# Altium PCB PCB2.PcbDoc
Units mm, origin at the board's own origin, x right, y up, seen from the top; angles counter-clockwise.
Board outline 52.5 x 30.5 mm, 2 copper layers (Top Layer, Bottom Layer), stack 0.8 mm thick; 37 components, 26 nets, 224 pads, 121 vias.
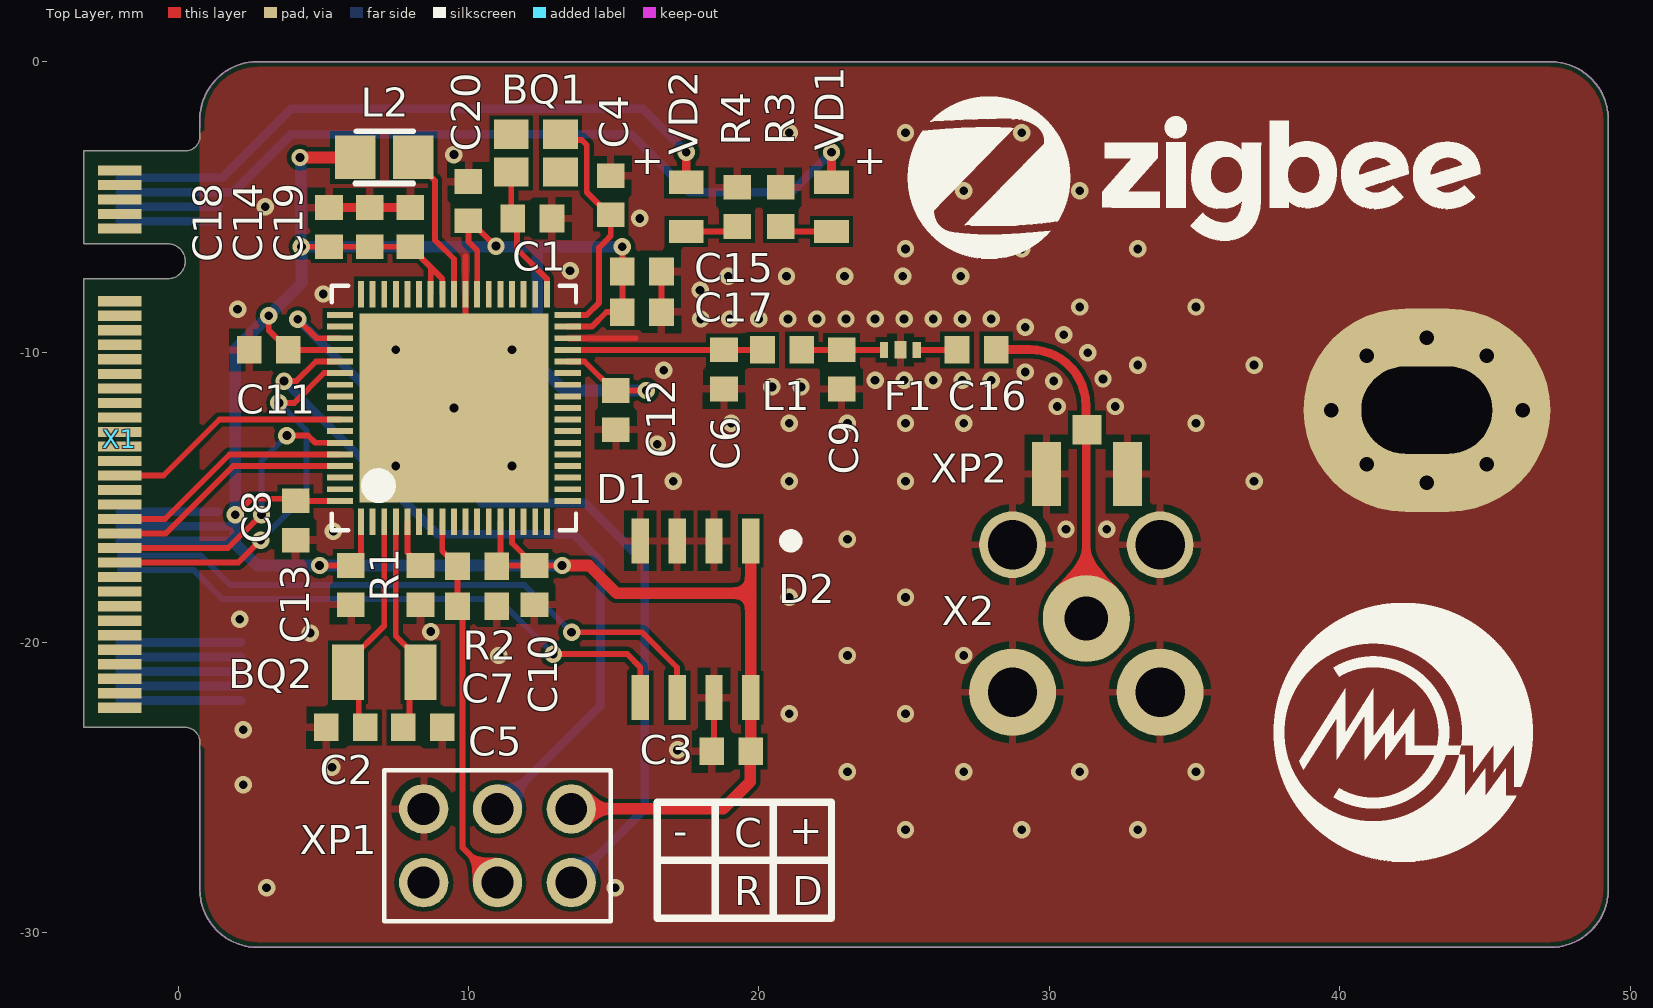
[diagram p0: Top Layer view]
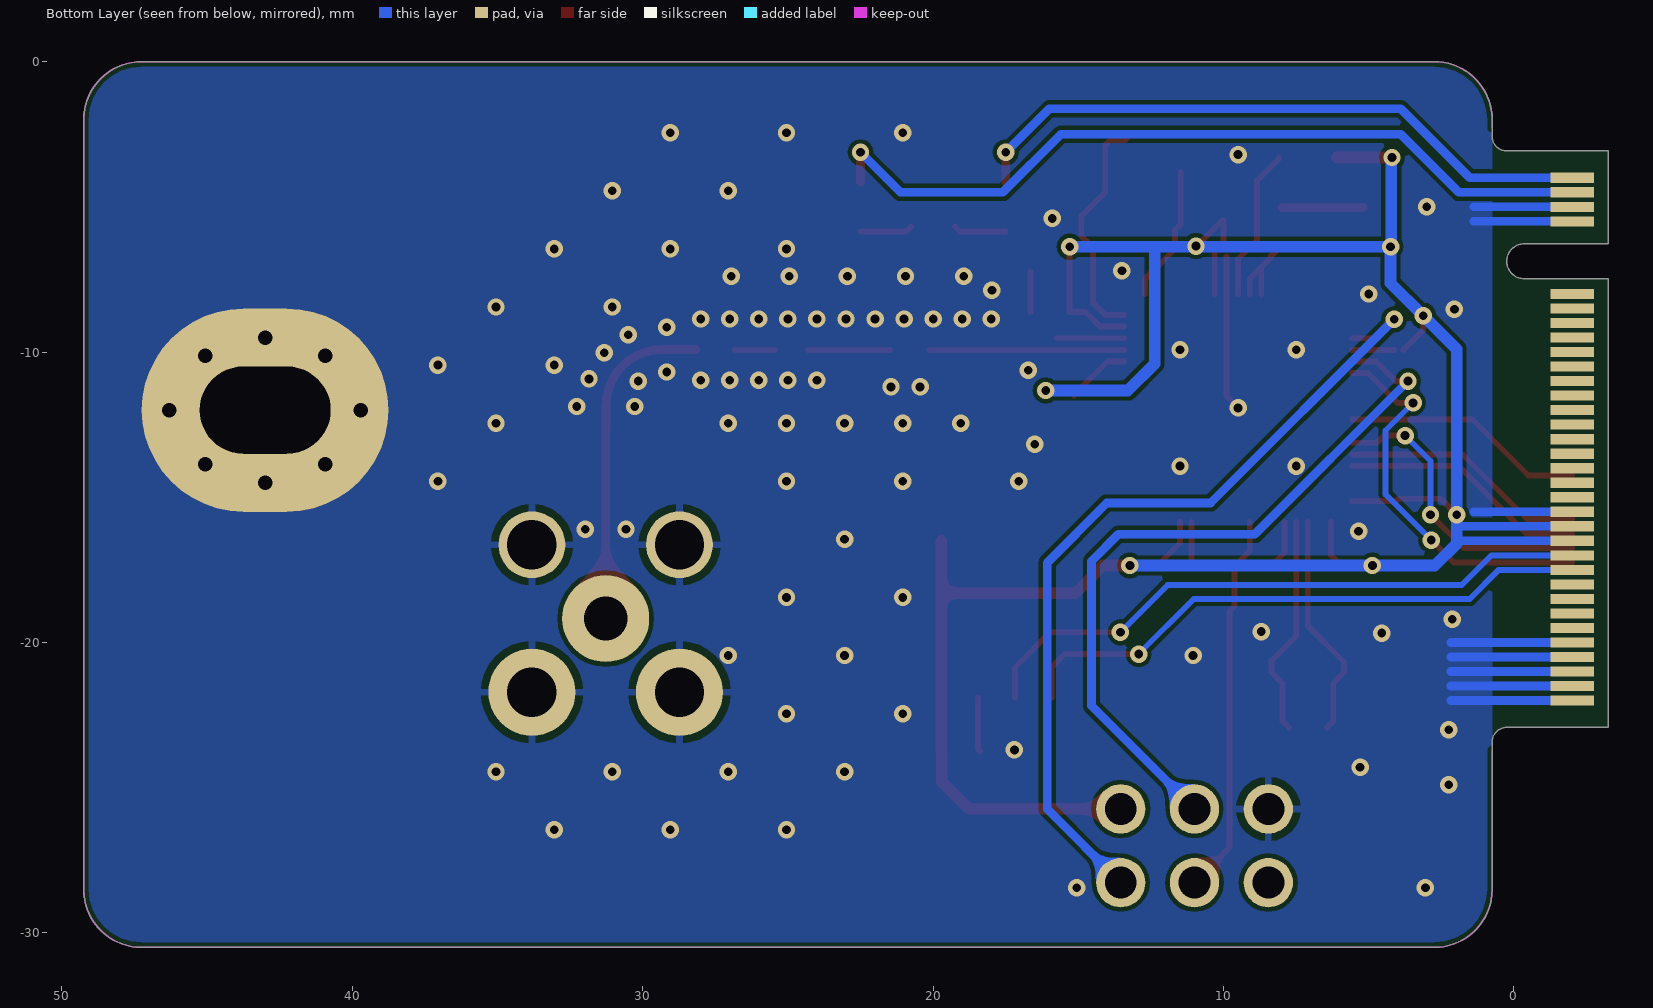
[diagram p1: Bottom Layer view, seen from below]
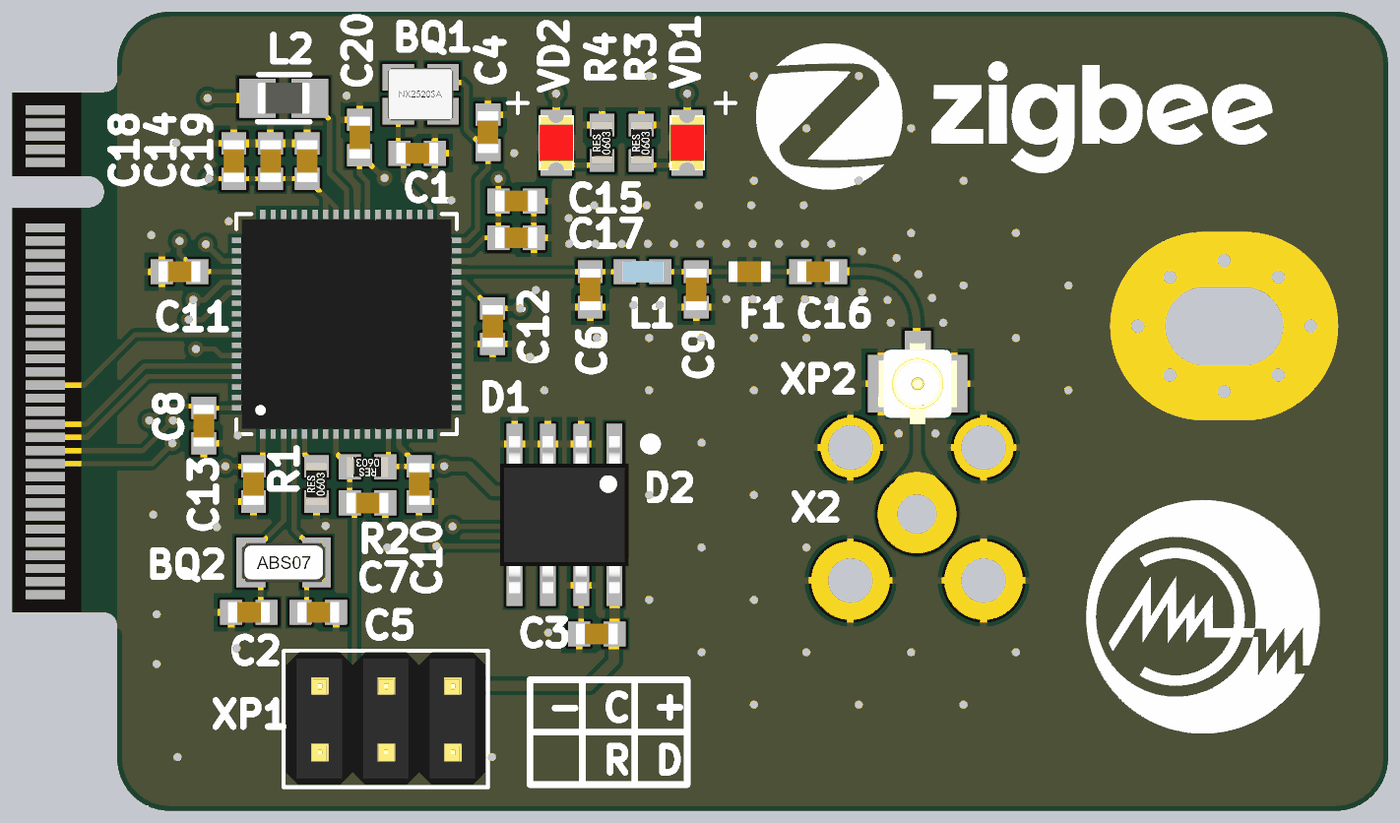
[diagram p2: 3D render of the assembled board from above, using the file's embedded part models]

## Layer stack, top to bottom
Top Solder: solder mask 0.0102, Solder Resist, Dk 3.5
Top Layer: signal copper 0.035
Dielectric 1: dielectric 0.73, FR-4, Dk 4.8
Bottom Layer: signal copper 0.035
Bottom Solder: solder mask 0.0102, Solder Resist, Dk 3.5

## Board outline
-3.25,-22.925 -3.25,-7.475 -0.35,-7.475 ccw(c-0.35,-6.875) -0.35,-6.275 -3.25,-6.275 -3.25,-3.075 0.25,-3.075 ccw(c0.25,-2.575) 0.75,-2.575 0.75,-2 cw(c2.75,-2) 2.75,0 47.25,0 cw(c47.25,-2) 49.25,-2 49.25,-28.5 cw(c47.25,-28.5) 47.25,-30.5 2.75,-30.5 cw(c2.75,-28.5) 0.75,-28.5 0.75,-23.425 ccw(c0.25,-23.425) 0.25,-22.925

## Design rules (kind name [scope] priority, off if disabled: settings)
Clearance [All] p1: gap=0.15 ignorepadtopadclearanceinfootprint=FALSE except(0: Arc-Hole Track-Hole SMDPad-Hole THPad-Hole Via-Hole Fill-Hole Poly-Hole Region-Hole Text-Hole)
ComponentClearance [All] p1: gap=0 collisioncheckmode=3 verticalgap=0 showdistances=FALSE
HoleSize [All] p1: absolutevalues=TRUE maxlimit=10 minlimit=0.3 maxpercent=80.000 minpercent=20.000
MinimumSolderMaskSliver [All] p1: minsoldermaskwidth=0.15
PolygonConnect [All vs IsVia] p1: connectstyle=Direct reliefconductorwidth=0.2 reliefentries=4 polygonreliefangle="90 Angle" airgapwidth=0.2
PolygonConnect PolygonConnect_2 [All vs (InNamedUnion('Mounting pad'))] p2: connectstyle=Direct reliefconductorwidth=0.2 reliefentries=4 polygonreliefangle="90 Angle" airgapwidth=0.2
PolygonConnect PolygonConnect_1 [All] p3: connectstyle=Relief reliefconductorwidth=0.254 reliefentries=4 polygonreliefangle="90 Angle" airgapwidth=0.254
RoutingVias [All] p1: holewidth=0.3 width=0.6 viastyle="Through Hole" minholewidth=0.3 minwidth=0.6 maxholewidth=0.6 maxwidth=0.9
SilkToSilkClearance [All] p1: silktosilkclearance=0
SilkToSolderMaskClearance [IsPad] p1: minsilkscreentomaskgap=0 clearancetoexposedcopper=TRUE
SolderMaskExpansion [All] p1: expansion=0.102 istentingtop=FALSE
Width [All] p1: maxlimit=0.5 minlimit=0.2 preferedwidth=0.3
25 further rules are at their usual default settings.

## Components (designator, comment, footprint, x,y, rotation, side; value= is the part's Value field where it differs from the comment)
BQ1 "Quarz" Crystal_2520 12.325,-3.15 r0 top value="32 МГц"
BQ2 "Quarz" ABS07 7.1,-21.025 r0 top value="32768 Гц"
C1 "C" C0603 12.2,-5.4 r180 top value="10 п"
C2 "C" C0603 5.775,-22.925 r180 top value="10 п"
C3 "C" C0603 19.05,-23.75 r180 top value="1 мк"
C4 "C" C0603 14.9,-4.6 r270 top value="10 п"
C5 "C" C0603 8.425,-22.925 r0 top value="10 п"
C6 "C" C0603 18.8,-10.6 r270 top locked value="0,8 п"
C7 "C" C0603 10.3,-18.75 r0 top value="100 н"
C8 "C" C0603 4.05,-15.8 r270 top value="100 н"
C9 "C" C0603 22.85,-10.6 r270 top locked value="0,3 п"
C10 "C" C0603 12.275,-18.025 r270 top value="100 н"
C11 "C" C0603 3.125,-9.925 r180 top value="100 н"
C12 "C" C0603 15.075,-12 r270 top value="100 н"
C13 "C" C0603 5.95,-18.025 r270 top value="100 н"
C14 "C" C0603 6.6,-5.7 r90 top value="100 н"
C15 "C" C0603 15.975,-7.225 r0 top value="100 н"
C16 "C" C0603 27.5,-9.925 r0 top locked value="10 н"
C17 "C" C0603 15.975,-8.625 r0 top value="100 п"
C18 "C" C0603 5.2,-5.7 r90 top value="4.7 мк"
C19 "C" C0603 8,-5.7 r90 top value="100 н"
C20 "C" C0603 10,-4.8 r90 top value="4.7 мк"
D1 "STM32WB55" VFQFN68-8X8MM 9.5,-11.925 r90 top
D2 "AT24MAC402 SOIC-8" SOIC8 19.725,-16.5 r270 top
F1 "LFB182G45CGFD436" 0603_3pin 24.875,-9.925 r90 top locked
L1 "L" INDC_0603 20.8,-9.925 r0 top locked value="2,7 н"
L2 "L" R0805 7.1,-3.3 r0 top value="10 мк"
R1 "R" R0603 8.35,-18.025 r90 top value="10 к"
R2 "R" R0603 10.3,-17.375 r180 top value="10 к"
R3 "R" R0603 20.75,-5 r90 top locked value=220
R4 "R" R0603 19.25,-5 r90 top locked value=220
VD1 "LED" LED_0805 22.5,-5 r270 top locked
VD2 "LED" LED_0805 17.5,-5 r270 top locked
X1 "M.2 - 1-2199230-4" "M.2 - 1-2199230-4 EDGE" -2,-13 r90 top locked
X2 "" SMA_kont 31.275,-19.175 r90 top
XP1 "PLD-6" PLD-6 11,-27 r270 top
XP2 "IPEX" IPEX 31.3,-14.2 r90 top

## Footprints (in the part's own frame and the unit in brackets; to place one, negate y for a bottom-side part, rotate by r counter-clockwise, add the part's x,y. Pads: shape width x height; smd on the part's side, far side on the other; paste and mask are expansions set on the pad)
0603_3pin [mil]
  rect 22x11 smd paste+0 mask+0: 1(0,22.05) 3(0,-22.05)
  rect 24x16 smd paste+0 mask+0: 2(0,0)
  body extent -16,-31 16,32, height 35
ABS07 [mm] "32.768"
  rect 1.1x1.9 smd: 1(-1.25,0) 2(1.25,0)
  body extent -1.61,-0.76 1.61,0.76, height 0.91
C0603 [mm]
  rect 0.85x0.95 smd: 1(-0.675,0) 2(0.675,0)
  body extent -0.8,-0.4 0.8,0.4, height 0.9
Crystal_2520 [mm]
  rect 1.2x1 smd: 0(-0.85,0.65) 0(0.85,-0.65) 1(-0.85,-0.65) 2(0.85,0.65)
  body extent -1.25,-1 1.25,1, height 0.65
INDC_0603 [mm] "Chip Inductor, 2-Leads, Body 1,60x1,00mm, IPC Medium Density"
  rect 0.85x0.95 smd: 1(-0.675,0) 2(0.675,0)
  body extent -0.78,-0.42 0.79,0.42, height 0.59
IPEX [mm]
  rect 1x1 smd: 1(1.524,0)
  rect 2.2x1 smd: 2(0,1.397) 2(0,-1.397)
  body extent -1.55,-1.5 1.55,1.5, height 1.25
LED_0805 [mm]
  rect 0.8x1.2 smd: 1(-0.85,0) 2(0.85,0)
  body extent -1.05,-0.67 1.05,0.68, height 0.9
"M.2 - 1-2199230-4 EDGE" [mm]
  rect 0.35x1.5 smd: 1(-9.25,0) 2(-8.75,0) 3(-8.25,0) 4(-7.75,0) 5(-7.25,0) 6(-6.75,0) 7(-6.25,0) 8(-5.75,0) 9(-5.25,0) 10(-4.75,0) 11(-4.25,0) 12(-3.75,0) 13(-3.25,0) 14(-2.75,0) 15(-2.25,0) 16(-1.75,0) 17(-1.25,0) 18(-0.75,0) 19(-0.25,0) 20(0.25,0) 21(0.75,0) 22(1.25,0) 23(1.75,0) 24(2.25,0) 25(2.75,0) 26(3.25,0) 27(3.75,0) 28(4.25,0) 29(4.75,0) 30(7.25,0) 31(7.75,0) 32(8.25,0) 33(8.75,0) 34(9.25,0)
  rect 0.35x1.5 smd far side: 35(9,0) 36(8.5,0) 37(8,0) 38(7.5,0) 39(5,0) 40(4.5,0) 41(4,0) 42(3.5,0) 43(3,0) 44(2.5,0) 45(2,0) 46(1.5,0) 47(1,0) 48(0.5,0) 49(0,0) 50(-0.5,0) 51(-1,0) 52(-1.5,0) 53(-2,0) 54(-2.5,0) 55(-3,0) 56(-3.5,0) 57(-4,0) 58(-4.5,0) 59(-5,0) 60(-5.5,0) 61(-6,0) 62(-6.5,0) 63(-7,0) 64(-7.5,0) 65(-8,0) 66(-8.5,0) 67(-9,0)
PLD-6 [mm]
  round 1.7 hole 1.1: 1(-1.27,2.54) 2(1.27,2.54) 3(-1.27,0) 4(1.27,0) 5(-1.27,-2.54) 6(1.27,-2.54)
  silkscreen extent -2.6,-3.9 2.6,3.9, body extent -2.56,-3.81 2.52,3.81, height 9.2
R0603 [mm]
  rect 0.85x0.95 smd: 1(-0.675,0) 2(0.675,0)
  body extent -0.8,-0.4 0.8,0.4, height 0.45
R0805 [mm] "Chip Resistor, 2-Leads, Body 2,00x1,25mm, IPC Medium Density"
  rect 1.4x1.5 smd: 1(-1,0) 2(1,0)
  silkscreen extent -1,-0.9 1,0.9, body extent -1,-0.6 1,0.6, height 0.5
SMA_kont [mm]
  round 3 hole 1.5: 1(0,0)
  round 3 hole 1.7: 2(-2.54,-2.54) 2(-2.54,2.54)
  round 2.3 hole 1.7: 2(2.54,-2.54) 2(2.54,2.54)
SOIC8 [mm]
  rect 1.55x0.6 smd: 1(0,0) 2(0,-1.27) 3(0,-2.54) 4(0,-3.81) 5(5.4,-3.81) 6(5.4,-2.54) 7(5.4,-1.27) 8(5.4,0)
  Top Layer region: 0,0 0,0 0,0 0,0
  body extent -0.3,-4.36 5.7,0.54, height 1.75
VFQFN68-8X8MM [mm]
  rect 0.91x0.204 smd paste+0 mask+0: 1(-3.922,3.2) 2(-3.922,2.8) 3(-3.922,2.4) 4(-3.922,2) 5(-3.922,1.6) 6(-3.922,1.2) 7(-3.922,0.8) 8(-3.922,0.4) 9(-3.922,0) 10(-3.922,-0.4) 11(-3.922,-0.8) 12(-3.922,-1.2) 13(-3.922,-1.6) 14(-3.922,-2) 15(-3.922,-2.4) 16(-3.922,-2.8) 17(-3.922,-3.2) 35(3.922,-3.2) 36(3.922,-2.8) 37(3.922,-2.4) 38(3.922,-2) 39(3.922,-1.6) 40(3.922,-1.2) 41(3.922,-0.8) 42(3.922,-0.4) 43(3.922,0) 44(3.922,0.4) 45(3.922,0.8) 46(3.922,1.2) 47(3.922,1.6) 48(3.922,2) 49(3.922,2.4) 50(3.922,2.8) 51(3.922,3.2)
  rect 0.204x0.91 smd paste+0 mask+0: 18(-3.2,-3.922) 19(-2.8,-3.922) 20(-2.4,-3.922) 21(-2,-3.922) 22(-1.6,-3.922) 23(-1.2,-3.922) 24(-0.8,-3.922) 25(-0.4,-3.922) 26(0,-3.922) 27(0.4,-3.922) 28(0.8,-3.922) 29(1.2,-3.922) 30(1.6,-3.922) 31(2,-3.922) 32(2.4,-3.922) 33(2.8,-3.922) 34(3.2,-3.922) 52(3.2,3.922) 53(2.8,3.922) 54(2.4,3.922) 55(2,3.922) 56(1.6,3.922) 57(1.2,3.922) 58(0.8,3.922) 59(0.4,3.922) 60(0,3.922) 61(-0.4,3.922) 62(-0.8,3.922) 63(-1.2,3.922) 64(-1.6,3.922) 65(-2,3.922) 66(-2.4,3.922) 67(-2.8,3.922) 68(-3.2,3.922)
  rect 6.502x6.502 smd paste-3.238 mask+0: 69(0,0)
  silkscreen extent -4.2,-4.2 4.2,4.2, body extent -4.02,-4.02 4.02,4.02, height 0.8

## Part data
C1 C2 C3 C4 C5 C6 C7 C8 C9 C10 C11 C12 C13 C14 C15 C16 C17 C18 C19 C20: Voltage=?
D2: library part AT24MAC402
VD1 VD2: library part VD_LED, Voltage=?
X1: library part M.2
X2 XP2: library part 2pin
XP1: library part 6pin, PartNumber=PLD-6

## Free pads (board coordinates)
  rrect100% 8.5x7 hole 3 slot 4.5 at 0 deg: 0(43,-12)

## Via types
v1: diameter 0.6, hole 0.3, Top Layer to Bottom Layer, tented both sides, 113 vias
v2: diameter 0.7, hole 0.5, Top Layer to Bottom Layer, tented both sides, 8 vias

## Nets (pads, with @x,y where several pads share a name; then routed paths per layer and width w, separated by ;. In a path a pad name is that pad's centre, name@x,y a point inside that pad or via, vN(x,y) a via of type N, cw(c..) or ccw(c..) an arc to the next point about the centre after c; other vN are vias at no path point)
3V3: C3.1 C8.1 C10.1 C11.1 C12.1 C13.1 C14.1 C15.1 C17.1 C18.1 C19.1 C20.1 D1.1 D1.13 D1.14 D1.30 D1.33 D1.41 D1.44 D1.45 D1.55 D1.68 D2.1 D2.8 L2.1 R2.1 X1.55 X1.56 XP1.1 | length 110
  Top Layer w0.2: v1(1.975,-15.6) 2.525,-15.05 3.975,-15.05 C8.1 D1.68 ; v1(3.125,-8.75) 3.125,-9.25 C11.1 ; C11.1@4.125,-9.925 D1.55 ; v1(4.25,-6.375) C18.1 C14.1 C19.1 8.05,-6.375 8.375,-6.7 8.375,-6.75 8.736,-7.111 ; v1(4.875,-17.35) C13.1 6.3,-17 D1.1 ; D1.45 8.7,-7.148 8.736,-7.111 ; D1.44 9.098,-8.001 9.098,-7.473 8.736,-7.111 ; D1.41 10.3,-6.5 10,-6.2 C20.1 10.05,-5.475 10.925,-6.35 v1(10.95,-6.35) ; R2.1 R2.1@11,-17.35 ; D1.13 11.1,-17.25 R2.1@11,-17.35 ; D1.14 11.5,-16.575 C10.1 ; v1(13.225,-17.35) C10.1 ; D1.30 14,-10.325 15.025,-11.35 15.025,-11.375 C12.1@15.15,-11.5 ; D1.33 14.25,-9.125 14.75,-8.625 C17.1 C15.1 v1(15.3,-6.375) ; C12.1 v1(16.125,-11.325) ; C3.1@19.7,-23.775 C3.1 ; R2.1@11,-17.35 C10.1
  Top Layer w0.4: v1(4.2,-3.3) L2.1 ; v1(13.225,-17.35) 14.15,-17.35 15.1,-18.3 19.725,-18.3 ; XP1.1 18.77,-25.73 19.7,-24.8 C3.1@19.7,-23.775 ; C3.1 D2.8 19.725,-18.3 ; D2.1 19.725,-18.3
  Bottom Layer w0.3: X1.56 1.875,-16.5 ; X1.55 1.975,-16
  Bottom Layer w0.4: v1(4.2,-3.3) 4.225,-3.325 4.225,-6.35 v1(4.25,-6.375) ; v1(13.225,-17.35) v1(4.875,-17.35) 2.725,-17.35 1.975,-16.6 1.975,-16 v1(1.975,-15.6) 1.975,-9.9 v1(3.125,-8.75) 4.25,-7.625 v1(4.25,-6.375) ; v1(15.3,-6.375) 12.4,-6.375 ; v1(16.125,-11.325) 13.3,-11.325 12.375,-10.4 12.375,-6.4 12.4,-6.375 ; v1(4.25,-6.375) 12.4,-6.375
ANT: C16.2 X2.1 XP2.1 | length 11.5
  Top Layer w0.3: C16.2 28.175,-9.912 29.325,-9.912 cw(c29.325,-11.85) 31.262,-11.85 XP2.1@31.262,-12.651 ; X2.1 XP2.1@31.275,-12.651
EEPROM_SCL: D2.6 X1.57 | length 21.8
  Top Layer w0.2: v1(13.55,-19.65) 15.975,-19.65 17.185,-20.86 D2.6
  Bottom Layer w0.2: X1.57 0.775,-17 1.8,-18.025 11.925,-18.025 v1(13.55,-19.65)
EEPROM_SDA: D2.5 X1.58 | length 20.4
  Top Layer w0.2: v1(12.925,-20.4) 15.465,-20.4 15.915,-20.85 D2.5
  Bottom Layer w0.2: X1.58 0.525,-17.5 1.525,-18.5 11.025,-18.5 v1(12.925,-20.4)
GND: C1.1 C2.2 C3.2 C4.1 C5.2 C6.2 C7.2 C8.2 C9.2 C10.2 C11.2 C12.2 C13.2 C14.2 C15.2 C17.2 C18.2 C19.2 C20.2 D1.32 D1.42 D1.69 D2.2 D2.3 D2.4 D2.7 F1.2 pad.0 R1.1 R3.2 R4.2 X1.37 X1.38 X1.54 X1.63 X1.64 X1.65 X1.66 X1.67 X2.2 XP1.5 XP2.2 | length 44.8
  Top Layer w0.2: v1(9.5,-11.925) 9.9,-11.525 D1.42 9.9,-6.7 ; D1.32 15.75,-9.525 ; C17.2 C15.2 ; C3.2 18.455,-23.67 D2.7
  Top Layer w0.3: C18.2 C14.2 C19.2
  Bottom Layer w0.3: X1.67 2.175,-22 ; X1.66 2.175,-21.5 ; X1.65 2.175,-21 ; X1.64 2.175,-20.5 ; X1.63 2.175,-20 ; X1.54 1.375,-15.5 ; X1.38 1.375,-5.5 ; X1.37 1.375,-5
  other v1: 3.05,-28.449 15.05,-28.449 25.05,-26.449 29.05,-26.449 33.05,-26.449 2.25,-24.9 23.05,-24.449 27.05,-24.449 31.05,-24.449 35.05,-24.449 5.3,-24.3 17.2,-23.7 2.25,-23 21.05,-22.449 25.05,-22.449 11.05,-20.449 23.05,-20.449 27.05,-20.449 4.55,-19.675 8.7,-19.625 2.125,-19.2 21.05,-18.449 25.05,-18.449 23.05,-16.449 5.35,-16.175 30.575,-16.1 31.975,-16.1 17.05,-14.449 21.05,-14.449 25.05,-14.449 37.05,-14.449 7.5,-13.925 11.5,-13.925 16.5,-13.175 19.05,-12.449 21.05,-12.449 23.05,-12.449 25.05,-12.449 27.05,-12.449 35.05,-12.449 30.275,-11.875 32.275,-11.875 20.45,-11.2 21.45,-11.2 30.15,-11 24,-10.975 25,-10.975 26,-10.975 27,-10.975 28,-10.975 31.85,-10.925 29.175,-10.688 16.725,-10.625 33.05,-10.449 37.05,-10.449 31.325,-10.025 7.5,-9.925 11.5,-9.925 30.5,-9.4 29.175,-9.149 18,-8.862 19,-8.862 20,-8.862 21,-8.862 22,-8.862 23,-8.862 24,-8.862 25,-8.862 26,-8.862 27,-8.862 28,-8.862 2.05,-8.525 31.05,-8.449 35.05,-8.449 5,-8 17.975,-7.875 18.95,-7.388 20.95,-7.388 22.95,-7.388 24.95,-7.388 26.95,-7.388 13.5,-7.2 25.05,-6.449 29.05,-6.449 33.05,-6.449 15.9,-5.4 3,-5 27.05,-4.449 31.05,-4.449 9.5,-3.2 21.05,-2.449 25.05,-2.449 29.05,-2.449
  other v2: 43,-14.5 40.932,-13.868 45.068,-13.868 39.7,-12 46.3,-12 40.932,-10.132 45.068,-10.132 43,-9.5
GPIO_RECEIVED: D1.61 X1.17 | length 8.4
  Top Layer w0.2: X1.17 -0.5,-14.25 1.425,-12.325 D1.61
LED1: VD1.1 X1.36 | length 27.8
  Top Layer w0.3: VD1.1 v1(22.5,-3.125)
  Bottom Layer w0.3: X1.36 1.9,-4.5 3.9,-2.5 15.6,-2.5 17.6,-4.5 21.125,-4.5 v1(22.5,-3.125)
LED2: VD2.1 X1.35 | length 22.1
  Top Layer w0.3: VD2.1 v1(17.5,-3.125)
  Bottom Layer w0.3: X1.35 1.525,-4 3.9,-1.625 16,-1.625 v1(17.5,-3.125)
NetBQ1_1: BQ1.1 C1.2 D1.35 | length 4.7
  Top Layer w0.2: BQ1.1 11.475,-5.6 11.675,-5.8 11.675,-6.45 12.7,-7.475 D1.35
NetBQ1_2: BQ1.2 C4.2 D1.34 | length 8.3
  Top Layer w0.2: BQ1.2@13.275,-2.5 BQ1.2 13.375,-2.7 13.9,-2.7 14.075,-2.875 14.075,-4.5 14.899,-5.324 14.899,-5.999 14.699,-6.198 14.699,-6.201 14.5,-6.4 14.5,-8.3 14.075,-8.725 D1.34
NetBQ2_1: BQ2.1 C2.1 D1.3 | length 7.8
  Top Layer w0.2: C2.1 6.225,-22.7 6.225,-21.4 BQ2.1 5.85,-20.675 7.1,-19.425 D1.3
NetBQ2_2: BQ2.2 C5.1 D1.4 | length 7.7
  Top Layer w0.2: D1.4 7.5,-19.775 8.35,-20.625 BQ2.2 7.975,-21.4 7.975,-22.7 C5.1
NetC6_1: C6.1 D1.31 L1.1 | length 6.7
  Top Layer w0.2: D1.31 C6.1 L1.1
NetC9_1: C9.1 F1.1 L1.2 | length 2.8
  Top Layer w0.2: L1.2 C9.1 F1.1
NetC16_1: C16.1 F1.3 | length 1.4
  Top Layer w0.2: F1.3 C16.1
NetD1_5: D1.5 R1.2 | length 1.7
  Top Layer w0.2: D1.5 7.9,-16.9 R1.2
NetD1_43: D1.43 L2.2 | length 5.3
  Top Layer w0.2: L2.2 8.1,-3.35 8.85,-4.1 8.85,-6.15 9.5,-6.8 D1.43
NetR3_1: R3.1 VD1.2 | length 1.8
  Top Layer w0.2: R3.1 20.925,-5.85 VD1.2
NetR4_1: R4.1 VD2.2 | length 1.8
  Top Layer w0.2: VD2.2 19.075,-5.85 R4.1
NRST: C7.1 D1.8 R2.2 XP1.4 | length 13.2
  Top Layer w0.2: D1.8 9.1,-16.85 R2.2 C7.1 9.8,-18.925 9.8,-27.07 XP1.4
SPI1_MISO: D1.64 X1.14 | length 8.5
  Top Layer w0.2: X1.14 -0.45,-15.75 1.775,-13.525 D1.64
SPI1_MOSI: D1.65 X1.13 | length 8.5
  Top Layer w0.2: X1.13 -0.425,-16.25 1.9,-13.925 D1.65
SPI1_NSS: D1.57 X1.11 | length 13.5
  Top Layer w0.2: X1.11 2.075,-17.25 v1(2.85,-16.475) ; v1(3.475,-11.751) 3.999,-11.751 5.025,-10.725 D1.57
  Bottom Layer w0.2: v1(2.85,-16.475) 4.425,-14.9 4.425,-12.7 v1(3.475,-11.751)
SPI1_SCK: D1.63 X1.12 | length 10.4
  Top Layer w0.2: X1.12 1.725,-16.75 v1(2.875,-15.6) ; v1(3.75,-12.875) 4.475,-12.875 4.725,-13.125 D1.63
  Bottom Layer w0.2: v1(2.875,-15.6) 2.875,-13.75 v1(3.75,-12.875)
SWCLK: D1.56 XP1.3 | length 27
  Top Layer w0.2: v1(3.65,-11) 4.075,-11 4.75,-10.325 D1.56
  Bottom Layer w0.3: v1(3.65,-11) 8.925,-16.275 13.625,-16.275 14.55,-17.2 14.55,-22.18 ; XP1.3 14.55,-22.18 ; 14.55,-20.9 14.55,-22.18
SWDIO: D1.54 XP1.2 | length 29.2
  Top Layer w0.2: v1(4.125,-8.875) 4.775,-9.525 D1.54
  Bottom Layer w0.3: v1(4.125,-8.875) 10.45,-15.2 14.025,-15.2 16.075,-17.25 16.075,-24.805 16.075,-25.735 XP1.2
pads on no net: BQ1.0 D1.2 D1.6 D1.7 D1.9 D1.10 D1.11 D1.12 D1.15 D1.16 D1.17 D1.18 D1.19 D1.20 D1.21 D1.22 D1.23 D1.24 D1.25 D1.26 D1.27 D1.28 D1.29 D1.36 D1.37 D1.38 D1.39 D1.40 D1.46 D1.47 D1.48 D1.49 D1.50 D1.51 D1.52 D1.53 D1.58 D1.59 D1.60 D1.62 D1.66 D1.67 X1.1 X1.2 X1.3 X1.4 X1.5 X1.6 X1.7 X1.8 X1.9 X1.10 X1.15 X1.16 X1.18 X1.19 X1.20 X1.21 X1.22 X1.23 X1.24 X1.25 X1.26 X1.27 X1.28 X1.29 X1.30 X1.31 X1.32 X1.33 X1.34 X1.39 X1.40 X1.41 X1.42 X1.43 X1.44 X1.45 X1.46 X1.47 X1.48 X1.49 X1.50 X1.51 X1.52 X1.53 X1.59 X1.60 X1.61 X1.62 XP1.6

## Polygon pours and split planes (outlines as drawn)
GND on Top Layer "GND_L01_P004" (solid, pour order 4): 0.75,0 0.75,-30.525 40.625,-30.525 49.25,-30.525 49.25,0 31.75,0
GND on Bottom Layer "GND_L02_P000" (solid, pour order 0): 0.75,0 0.75,-30.525 40.625,-30.525 49.25,-30.525 49.25,0 31.75,0

## Keep-outs
Keep-Out Layer:
  lines w0.05: 0.75,-23.725 0.75,-28.5 ccw(c2.75,-28.5) 2.75,-30.5 47.25,-30.5 ccw(c47.25,-28.5) 49.25,-28.5 49.25,-2 ccw(c47.25,-2) 47.25,0 2.75,0 ccw(c2.75,-2) 0.75,-2 0.75,-2.275

## Silkscreen, mask and mechanical layers (free items; w line width, h text height)
Top Overlay:
  drawing of 18 lines, arcs and shapes, not listed
  text "+" at 16.75,-3.875 h1
  text "+" at 23.25,-3.875 h1
  text "+" at 21.054,-26.946 h1
  text "-" at 17.054,-26.974 h1
  text "C" at 19.154,-27.046 h1
  text "R" at 19.154,-29.046 h1
  text "D" at 21.154,-29.046 h1